# Altium PCB Altium PCB.pcbdoc
Units mil, origin at the board's own origin, x right, y up, seen from the top; angles counter-clockwise.
Board outline 4600 x 4620 mil, 2 copper layers (Top Layer, Bottom Layer); 37 components, 96 nets, 178 pads, 15 vias.
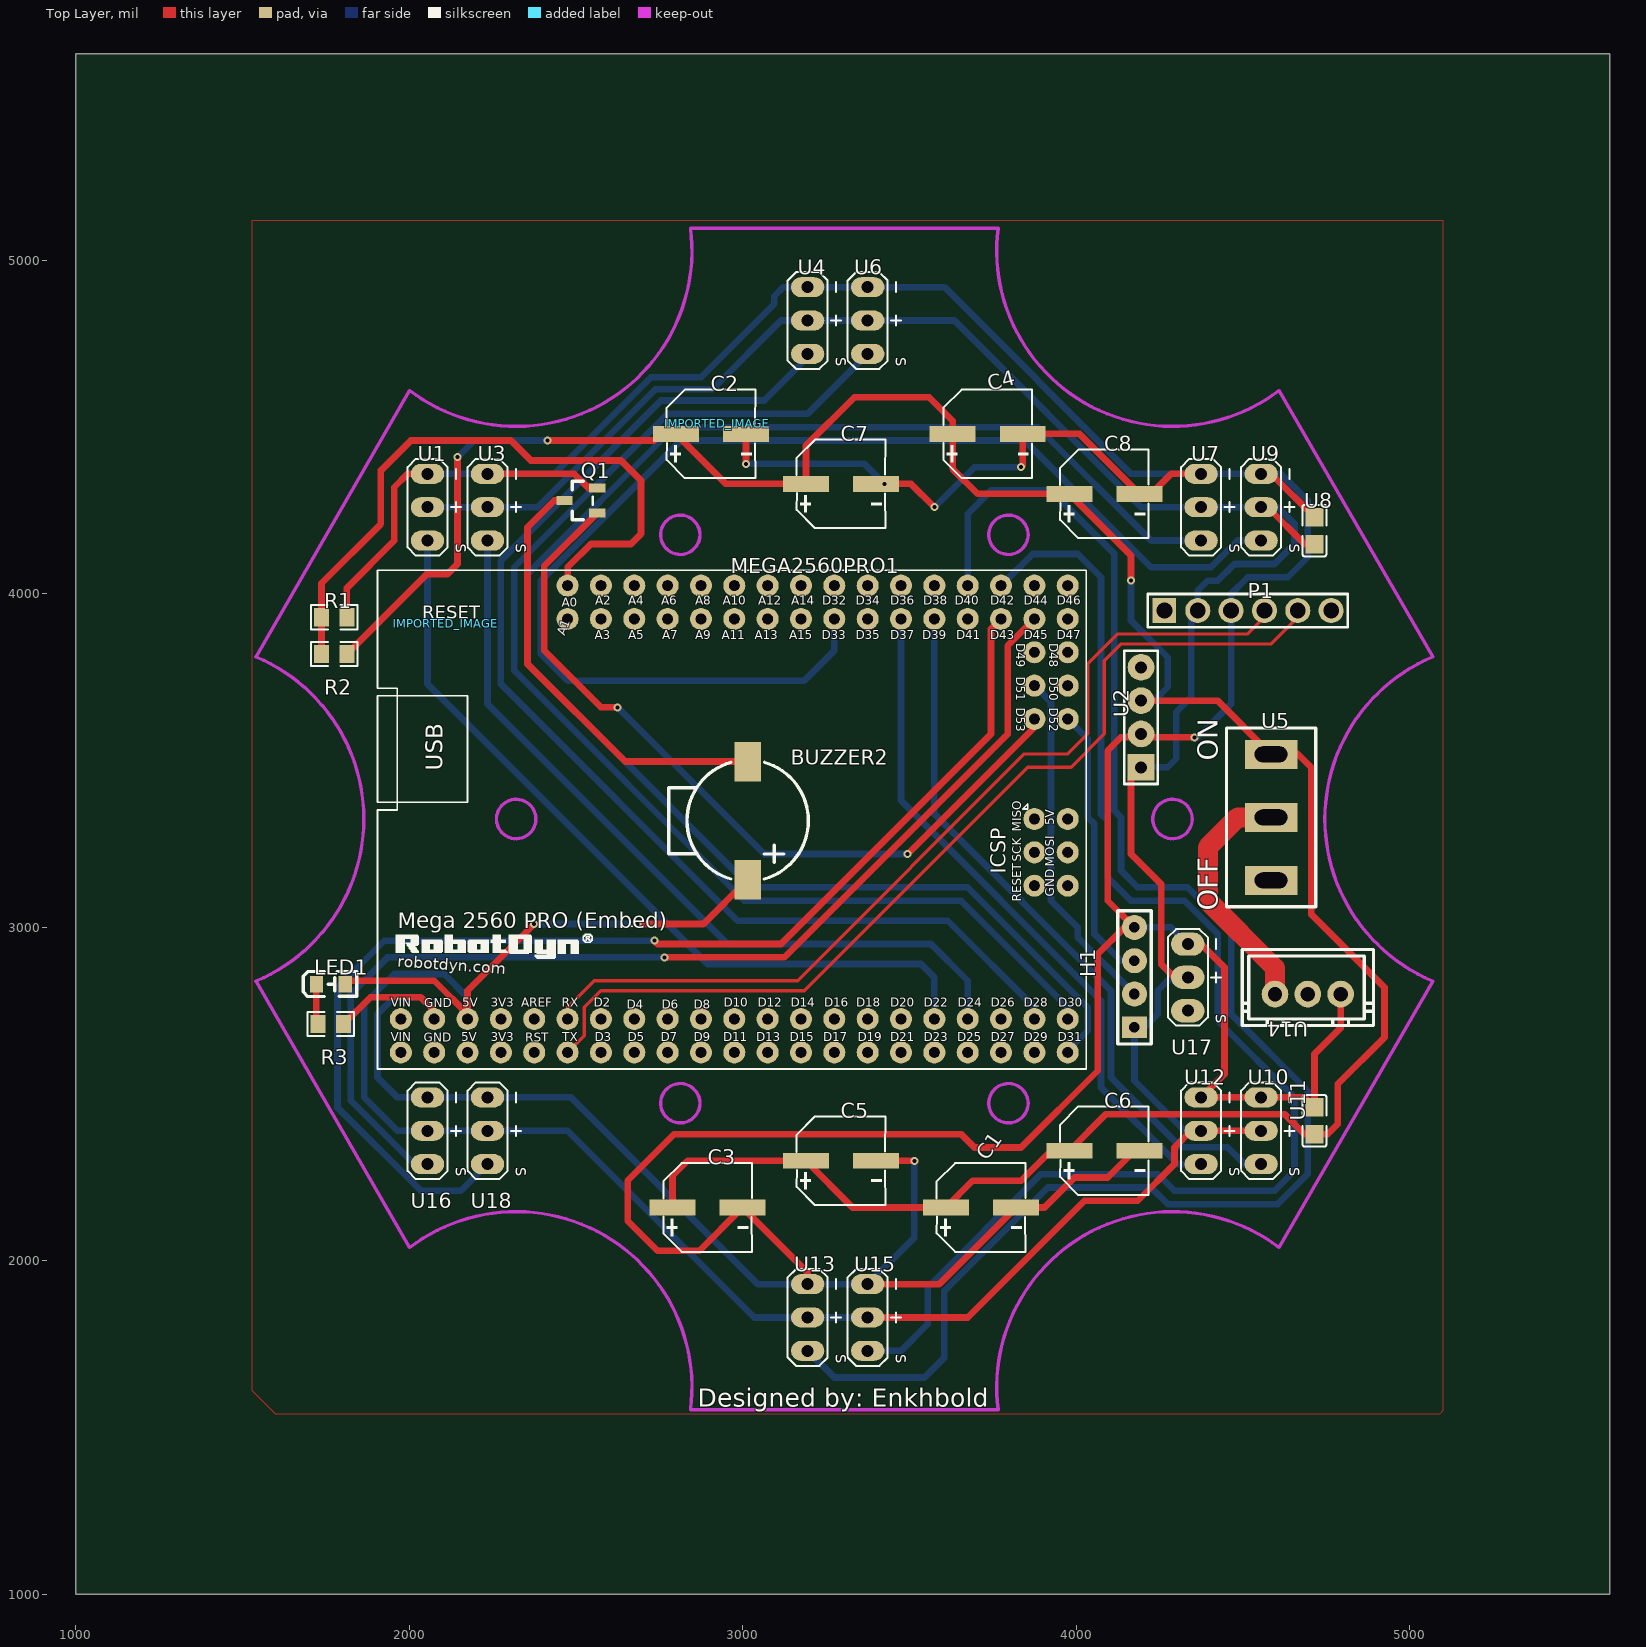
[diagram p0: Top Layer view]
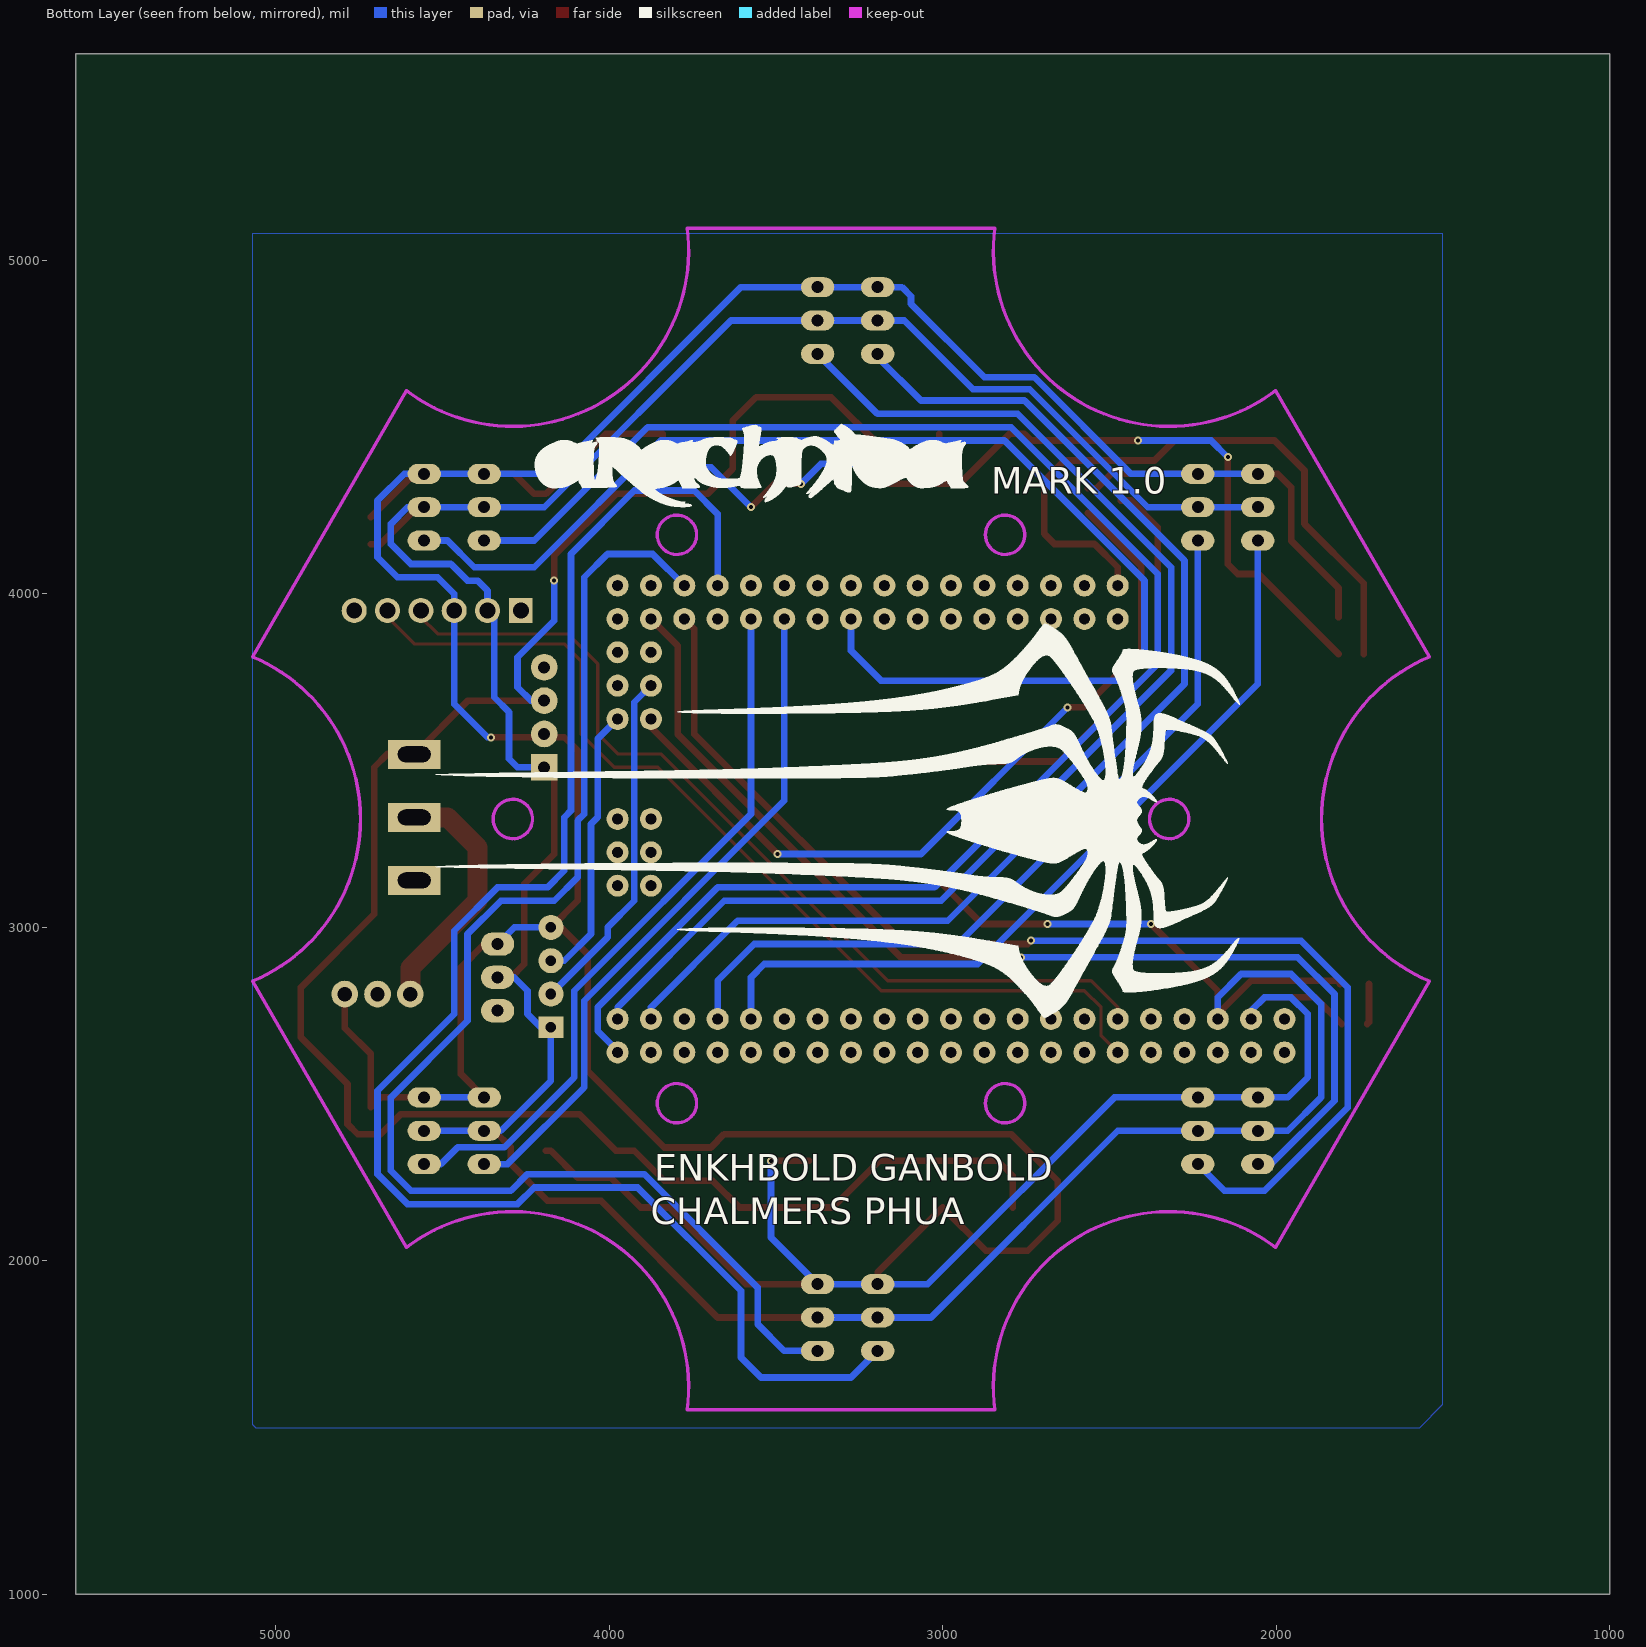
[diagram p1: Bottom Layer view, seen from below]

## Layer stack, top to bottom
Top Layer: signal copper (thickness not stored)
Dielectric: dielectric 12.6, FR-4, Dk 4.8
Bottom Layer: signal copper (thickness not stored)

## Board outline
5600,1000 1000,1000 1000,5620 5600,5620

## Components (designator, comment, footprint, x,y, rotation, side; value= is the part's Value field where it differs from the comment)
BUZZER2 "KLJ-9025-3627" BUZ-SMD_KLJ-90XX-3627 3015,3320 r270 top
C1 "220uF" CAP-SMD_BD6.3-L6.6-W6.6-FD 3715,2160 r0 top
C2 "220uF" CAP-SMD_BD6.3-L6.6-W6.6-FD 2905,4480 r0 top
C3 "220uF" CAP-SMD_BD6.3-L6.6-W6.6-FD 2895,2160 r0 top
C4 "220uF" CAP-SMD_BD6.3-L6.6-W6.6-FD 3735,4480 r0 top
C5 "220uF" CAP-SMD_BD6.3-L6.6-W6.6-FD 3295,2300 r0 top
C6 "220uF" CAP-SMD_BD6.3-L6.6-W6.6-FD 4085,2330 r0 top
C7 "220uF" CAP-SMD_BD6.3-L6.6-W6.6-FD 3295,4330 r0 top
C8 "220uF" CAP-SMD_BD6.3-L6.6-W6.6-FD 4085,4300 r0 top
H1 "Header-Male-2.54_1x4" 2.54-1*4P_JX 4175,2850 r90 top
IMPORTED_IMAGE "IMPORTED_IMAGE" IMPORTED_IMAGE 2109.57,3910.55 r0 top
IMPORTED_IMAGE "IMPORTED_IMAGE" IMPORTED_IMAGE 2923.52,4510.61 r0 top
LED1 "LED0805" LED0805-RD 1765,2830 r0 top
MEGA2560PRO1 "MEGA2560PRO-EMBED" MEGA2560PRO-EMBED 3275,3375 r0 top
P1 "Bluetooth JDY-30" HDR-6X1/2.54 4515,3950 r0 top
Q1 "2N3904TFR" SOT-23-3_L2.9-W1.3-P1.90-LS2.4-TR 2515,4280 r0 top
R1 "4.7KΩ" R0805 1775,3930 r180 top
R2 "3.3KΩ" R0805 1775,3820 r0 top
R3 "3.3KΩ" R0805 1765,2710 r180 top
U1 "sensor-header-3pin" SERVO-HEADER-3PIN#1 2055,4260 r0 top
U2 "DROK 5V REG" HDR1X4 4195,3630 r90 top
U3 "sensor-header-3pin" SERVO-HEADER-3PIN#1 2235,4260 r0 top
U4 "sensor-header-3pin" SERVO-HEADER-3PIN#1 3195,4820 r0 top
U5 "CYT1107" CYT1107 4585,3330 r270 top
U6 "sensor-header-3pin" SERVO-HEADER-3PIN#1 3375,4820 r0 top
U7 "sensor-header-3pin" SERVO-HEADER-3PIN#1 4375,4260 r0 top
U8 "0.47uF-C0805" C0805 4715,4190 r90 top
U9 "sensor-header-3pin" SERVO-HEADER-3PIN#1 4555,4260 r0 top
U10 "sensor-header-3pin" SERVO-HEADER-3PIN#1 4555,2390 r0 top
U11 "0.47uF-C0805" C0805 4715,2420 r90 top
U12 "sensor-header-3pin" SERVO-HEADER-3PIN#1 4375,2390 r0 top
U13 "sensor-header-3pin" SERVO-HEADER-3PIN#1 3195,1830 r0 top
U14 "HEAD3" CONN-TH_XH2.54-3P 4695,2800 r180 top
U15 "sensor-header-3pin" SERVO-HEADER-3PIN#1 3375,1830 r0 top
U16 "sensor-header-3pin" SERVO-HEADER-3PIN#1 2055,2390 r0 top
U17 "sensor-header-3pin" SERVO-HEADER-3PIN#2 4335,2850 r0 top
U18 "sensor-header-3pin" SERVO-HEADER-3PIN#1 2235,2390 r0 top

## Footprints (in the part's own frame and the unit in brackets; to place one, negate y for a bottom-side part, rotate by r counter-clockwise, add the part's x,y. Pads: shape width x height; smd on the part's side, far side on the other; paste and mask are expansions set on the pad)
2.54-1*4P_JX [mm]
  rect 1.651x1.905 hole 0.81: 1(-3.81,0)
  round 1.905 hole 0.81: 2(-1.27,0) 3(1.27,0) 4(3.81,0)
  silkscreen extent -5.08,-1.27 5.08,1.27
BUZ-SMD_KLJ-90XX-3627 [mm]
  rect 3x2 smd: 1(4.5,0) 2(-4.5,0)
  silkscreen extent -4.44,-6 4.45,4.62
C0805 [mm]
  rect 1.41x1.35 smd: 1(-1.03,0) 2(1.03,0)
  silkscreen extent -1.96,-0.9 1.96,0.9
CAP-SMD_BD6.3-L6.6-W6.6-FD [mm]
  rect 3.5x1.2 smd: 1(-2.67,0) 2(2.67,0)
  silkscreen extent -3.38,-3.38 3.38,3.38
CONN-TH_XH2.54-3P [mil]
  round 80 hole 43.31: 1(-98.43,0) 2(0,0) 3(98.42,0)
  silkscreen extent -197,-134 197,94
CYT1107 [mm]
  rect 2.2x4 hole 1.2 slot 2.5 at 90 deg: 1(-4.8,0) 2(0,0) 3(4.8,0)
  silkscreen extent -6.8,-3.4 6.8,3.4
HDR1X4 [mil]
  rect 80x80 hole 36: 1(-150,0)
  round 80 hole 36: 2(-50,0) 3(50,0) 4(150,0)
  silkscreen extent -200,-50 200,50
HDR-6X1/2.54 [mm]
  rect 1.8x1.905 hole 1.2: 1(-6.35,0)
  round 1.905 hole 1.2: 2(-3.81,0) 3(-1.27,0) 4(1.27,0) 5(3.81,0) 6(6.35,0)
  silkscreen extent -7.62,-1.27 7.62,1.27
IMPORTED_IMAGE [mil]
LED0805-RD [mm]
  rect 1x1.25 smd: 1(-1.1,0) 2(1.1,0)
  silkscreen extent -2.1,-0.95 1.98,0.96
MEGA2560PRO-EMBED [mil]
  round 66 hole 31.5 slot 31.7 at 0 deg: 3V3@1(-1000,-750) 3V3@2(-1000,-650) 5V@1(-1100,-750) 5V@2(-1100,-650) 5V@3(700,-50) A0(-800,650) A1(-800,550) A2(-700,650) A3(-700,550) A4(-600,650) A5(-600,550) A6(-500,650) A7(-500,550) A8(-400,650) A9(-400,550) A10(-300,650) A11(-300,550) A12(-200,650) A13(-200,550) A14(-100,650) A15(-100,550) AREF(-900,-650) D2(-700,-650) D3(-700,-750) D4(-600,-650) D5(-600,-750) D6(-500,-650) D7(-500,-750) D8(-400,-650) D9(-400,-750) D10(-300,-650) D11(-300,-750) D12(-200,-650) D13(-200,-750) D14(-100,-650) D15(-100,-750) D16(0,-650) D17(0,-750) D18(100,-650) D19(100,-750) D20(200,-650) D21(200,-750) D22(300,-650) D23(300,-750) D24(400,-650) D25(400,-750) D26(500,-650) D27(500,-750) D28(600,-650) D29(600,-750) D30(700,-650) D31(700,-750) D32(0,650) D33(0,550) D34(100,650) D35(100,550) D36(200,650) D37(200,550) D38(300,650) D39(300,550) D40(400,650) D41(400,550) D42(500,650) D43(500,550) D44(600,650) D45(600,550) D46(700,650) D47(700,550) D48(700,450) D49(600,450) D50(700,350) D51(600,350) D52(700,250) D53(600,250) GND@1(-1200,-750) GND@2(-1200,-650) GND@3(700,-250) MISO(600,-50) MOSI(700,-150) RESET(600,-250) RST(-900,-750) RX(-800,-650) SCK(600,-150) TX(-800,-750) VIN@1(-1300,-750) VIN@2(-1300,-650)
  silkscreen extent -1370,-800 756,696
R0805 [mil]
  rect 44.59x54.21 smd: 1(-38.04,0) 2(38.04,0)
  silkscreen extent -69,-36 69,36
SERVO-HEADER-3PIN#1 [mil]
  oval 100x60 hole 36: 1(0,100) 2(0,0) 3(0,-100)
  silkscreen extent -60,-145 100,145
SERVO-HEADER-3PIN#2 [mil]
  oval 100x70 hole 36: 1(0,100) 2(0,0) 3(0,-100)
  silkscreen extent -60,-145 100,145
SOT-23-3_L2.9-W1.3-P1.90-LS2.4-TR [mm]
  rect 1.25x0.7 smd: 1(1.25,0.95) 2(1.25,-0.95) 3(-1.25,0)
  silkscreen extent -0.65,-1.46 0.9,1.46

## Via types
v1: diameter 24, hole 12, Top Layer to Bottom Layer, tented both sides, 15 vias

## Nets (pads, with @x,y where several pads share a name; then routed paths per layer and width w, separated by ;. In a path a pad name is that pad's centre, name@x,y a point inside that pad or via, vN(x,y) a via of type N, cw(c..) or ccw(c..) an arc to the next point about the centre after c; other vN are vias at no path point)
BVIN: U5.2 U14.3 | length 750.8
  Top Layer w60: U5.2 4485,3330 4395,3240 4395,3080 4596.6,2878.4 U14.3
D22: MEGA2560PRO1.D22 U1.3 | length 2439.5
  Bottom Layer w20: U1.3 2055,3730 2895,2890 3535,2890 3575,2850 MEGA2560PRO1.D22
D24: MEGA2560PRO1.D24 U3.3 | length 2388.8
  Bottom Layer w20: U3.3 2235,3670 2955,2950 3565,2950 3675,2840 MEGA2560PRO1.D24
D28: MEGA2560PRO1.D28 U4.3 | length 3589.5
  Bottom Layer w20: U4.3 3195,4710 3065,4580 2755,4580 2275,4100 2275,3730 2985,3020 3615,3020 3875,2760 MEGA2560PRO1.D28
D30: MEGA2560PRO1.D30 U6.3 | length 3748.5
  Bottom Layer w20: U6.3 3195,4540 2775,4540 2315,4080 2315,3770 3005,3080 3655,3080 3975,2760 MEGA2560PRO1.D30
D31: MEGA2560PRO1.D31 U7.3 | length 4879.6
  Bottom Layer w20: MEGA2560PRO1.D31 3975,2630 4035,2690 4035,2760 3675,3120 3025,3120 2355,3790 2355,4060 2795,4500 3885,4500 4225,4160 U7.3
D33: MEGA2560PRO1.D33 U9.3 | length 3789.9
  Bottom Layer w20: MEGA2560PRO1.D33 3275,3830 3185,3740 2475,3740 2395,3820 2395,4040 2815,4460 3845,4460 4225,4080 4405,4080 4485,4160 U9.3
D37: MEGA2560PRO1.D37 U12.3 | length 2048.8
  Bottom Layer w20: MEGA2560PRO1.D37 3475,3380 4075,2780 4075,2520 4305,2290 U12.3
D39: MEGA2560PRO1.D39 U10.3 | length 2152.2
  Bottom Layer w20: MEGA2560PRO1.D39 3575,3340 4105,2810 4105,2550 4314.9,2340.1 4454.9,2340.1 4505,2290 U10.3
D40: MEGA2560PRO1.D40 U13.3 | length 4895.2
  Bottom Layer w20: U13.3 3275,1650 3545,1650 3605,1710 3605,1910 3915,2220 4225,2220 4275,2170 4605,2170 4695,2260 4695,2510 4465,2740 4465,2990 4335,3120 4185,3120 4135,3170 4135,3330 4115,3350 4115,4120 3925,4310 3745,4310 3675,4240 MEGA2560PRO1.D40
D42: MEGA2560PRO1.D42 U15.3 | length 4091.8
  Bottom Layer w20: U15.3 3475,1730 3555,1810 3555,1920 3895,2260 4245,2260 4295,2210 4595,2210 4655,2270 4655,2490 4425,2720 4425,2980 4325,3080 4165,3080 4095,3150 4095,3320 4075,3340 4075,4050 4005,4120 3870,4120 MEGA2560PRO1.D42
D43: MEGA2560PRO1.D43 U18.3 | length 3587.2
  Top Layer w20: v1(2735,2960) 2745,2950 3115,2950 3745,3580 3745,3895 MEGA2560PRO1.D43
  Bottom Layer w20: U18.3 2155,2210 2035,2210 1785,2460 1785,2820 1925,2960 v1(2735,2960)
D45: MEGA2560PRO1.D45 U16.3 | length 3299.9
  Top Layer w20: v1(2765,2910) 3125,2910 3795,3580 3795,3845 MEGA2560PRO1.D45
  Bottom Layer w20: U16.3 2015,2290 1825,2480 1825,2800 1935,2910 v1(2765,2910)
D49-USONIC: U17.3
D53-BUZZ: MEGA2560PRO1.D53 Q1.2 | length 2383.6
  Top Layer w20: Q1.2 2405,4083.4 2405,3830 2575,3660 v1(2625,3660) ; v1(3495,3220) 3875,3600 MEGA2560PRO1.D53
  Bottom Layer w20: v1(2625,3660) 3065,3220 v1(3495,3220)
ECHO: H1.3 MEGA2560PRO1.D52 | length 831.3
  Bottom Layer w20: MEGA2560PRO1.D52 4035,3565 4035,3330 4055,3310 4055,2980 4135,2900 H1.3
GND: C1.2 C2.2 C3.2 C4.2 C5.2 C6.2 C7.2 C8.2 H1.4 MEGA2560PRO1.GND@2 P1.3 Q1.1 R1.1 R3.1 U1.1 U2.2 U3.1 U4.1 U6.1 U7.1 U8.2 U9.1 U10.1 U11.2 U12.1 U13.1 U14.1 U15.1 U16.1 U17.1 U18.1 | length 16408.2
  Top Layer w20: R3.1 1883,2790 2035,2790 2075,2750 2075,2725 ; R1.1 1813,4018 1955,4160 1955,4320 1995,4360 U1.1 ; U3.1 2495,4360 2537.6,4317.4 Q1.1 ; v1(3010.12,4390) C2.2 ; U13.1 3195,1965.12 C3.2 2870.1,2030 2745,2030 2655,2120 2655,2240 2795,2380 3655.4,2380 3695.4,2340 3835,2340 4065,2570 4065,2920 4145,3000 H1.4 4095,3080 4095,3530 4135,3570 4185,3570 U2.2 4205,3570 v1(4355,3570) ; U15.1 3590.12,1930 C1.2 3905.45,2160 3995.45,2250 4095,2250 4175,2330 C6.2 ; C5.2 v1(3515,2300) ; v1(3425,4330) 3505,4330 v1(3575,4260) ; v1(3835,4380) 3840.12,4385.12 C4.2 4010.12,4480 C8.2 4225,4300 4285,4360 U7.1 ; U17.1 4375,2950 4445,2880 4445,2560 U12.1 U10.1 4685.55,2490 U11.2 4715,2620 4793.42,2698.42 U14.1 ; U9.1 4585.55,4360 U8.2
  Bottom Layer w20: U1.1 U3.1 2435,4360 2725,4650 2875,4650 3095,4870 3095,4892.6 3122.4,4920 U4.1 U6.1 3605,4920 4165,4360 U7.1 U9.1 4615,4360 4695,4280 4695,4110 4635,4050 4515,4050 4465,4000 P1.3 4465,3670 4365,3570 v1(4355,3570) ; 2075,2725 2075,2750 2035,2790 1955,2790 1905,2740 1905,2550 1965,2490 U16.1 U18.1 2485,2490 3045,1930 U13.1 U15.1 3515,2070 v1(3515,2300) ; v1(3010.12,4390) 3365,4390 v1(3425,4330) ; v1(3575,4260) 3695,4380 v1(3835,4380) ; H1.4 4285,3000 U17.1 ; U12.1 U10.1
MEGA2560PRO1_3V3@1: MEGA2560PRO1.3V3@1
MEGA2560PRO1_3V3@2: MEGA2560PRO1.3V3@2
MEGA2560PRO1_5V@1: MEGA2560PRO1.5V@1
MEGA2560PRO1_5V@3: MEGA2560PRO1.5V@3
MEGA2560PRO1_A1: MEGA2560PRO1.A1
MEGA2560PRO1_A2: MEGA2560PRO1.A2
MEGA2560PRO1_A3: MEGA2560PRO1.A3
MEGA2560PRO1_A4: MEGA2560PRO1.A4
MEGA2560PRO1_A5: MEGA2560PRO1.A5
MEGA2560PRO1_A6: MEGA2560PRO1.A6
MEGA2560PRO1_A7: MEGA2560PRO1.A7
MEGA2560PRO1_A8: MEGA2560PRO1.A8
MEGA2560PRO1_A9: MEGA2560PRO1.A9
MEGA2560PRO1_A10: MEGA2560PRO1.A10
MEGA2560PRO1_A11: MEGA2560PRO1.A11
MEGA2560PRO1_A12: MEGA2560PRO1.A12
MEGA2560PRO1_A13: MEGA2560PRO1.A13
MEGA2560PRO1_A14: MEGA2560PRO1.A14
MEGA2560PRO1_A15: MEGA2560PRO1.A15
MEGA2560PRO1_AREF: MEGA2560PRO1.AREF
MEGA2560PRO1_D2: MEGA2560PRO1.D2
MEGA2560PRO1_D3: MEGA2560PRO1.D3
MEGA2560PRO1_D4: MEGA2560PRO1.D4
MEGA2560PRO1_D5: MEGA2560PRO1.D5
MEGA2560PRO1_D6: MEGA2560PRO1.D6
MEGA2560PRO1_D7: MEGA2560PRO1.D7
MEGA2560PRO1_D8: MEGA2560PRO1.D8
MEGA2560PRO1_D9: MEGA2560PRO1.D9
MEGA2560PRO1_D10: MEGA2560PRO1.D10
MEGA2560PRO1_D11: MEGA2560PRO1.D11
MEGA2560PRO1_D12: MEGA2560PRO1.D12
MEGA2560PRO1_D13: MEGA2560PRO1.D13
MEGA2560PRO1_D14: MEGA2560PRO1.D14
MEGA2560PRO1_D15: MEGA2560PRO1.D15
MEGA2560PRO1_D16: MEGA2560PRO1.D16
MEGA2560PRO1_D17: MEGA2560PRO1.D17
MEGA2560PRO1_D18: MEGA2560PRO1.D18
MEGA2560PRO1_D19: MEGA2560PRO1.D19
MEGA2560PRO1_D20: MEGA2560PRO1.D20
MEGA2560PRO1_D21: MEGA2560PRO1.D21
MEGA2560PRO1_D23: MEGA2560PRO1.D23
MEGA2560PRO1_D25: MEGA2560PRO1.D25
MEGA2560PRO1_D26: MEGA2560PRO1.D26
MEGA2560PRO1_D27: MEGA2560PRO1.D27
MEGA2560PRO1_D29: MEGA2560PRO1.D29
MEGA2560PRO1_D32: MEGA2560PRO1.D32
MEGA2560PRO1_D34: MEGA2560PRO1.D34
MEGA2560PRO1_D35: MEGA2560PRO1.D35
MEGA2560PRO1_D36: MEGA2560PRO1.D36
MEGA2560PRO1_D38: MEGA2560PRO1.D38
MEGA2560PRO1_D41: MEGA2560PRO1.D41
MEGA2560PRO1_D44: MEGA2560PRO1.D44
MEGA2560PRO1_D46: MEGA2560PRO1.D46
MEGA2560PRO1_D47: MEGA2560PRO1.D47
MEGA2560PRO1_D48: MEGA2560PRO1.D48
MEGA2560PRO1_D49: MEGA2560PRO1.D49
MEGA2560PRO1_D50: MEGA2560PRO1.D50
MEGA2560PRO1_GND@1: MEGA2560PRO1.GND@1
MEGA2560PRO1_GND@3: MEGA2560PRO1.GND@3
MEGA2560PRO1_MISO: MEGA2560PRO1.MISO
MEGA2560PRO1_MOSI: MEGA2560PRO1.MOSI
MEGA2560PRO1_RESET: MEGA2560PRO1.RESET
MEGA2560PRO1_RST: MEGA2560PRO1.RST
MEGA2560PRO1_SCK: MEGA2560PRO1.SCK
MEGA2560PRO1_VIN@1: MEGA2560PRO1.VIN@1
MEGA2560PRO1_VIN@2: MEGA2560PRO1.VIN@2
P1_1: P1.1
P1_6: P1.6
Q1_3: BUZZER2.2 Q1.3 | length 1335.2
  Top Layer w20: Q1.3 2435,4280 2355,4200 2355,3790 2647.8,3497.2 BUZZER2.2
R3_2: LED1.1 R3.2 | length 122.2
  Top Layer w20: LED1.1 1721.69,2715.27 R3.2
RXD: MEGA2560PRO1.TX P1.5 | length 2929.2
  Top Layer w10: MEGA2560PRO1.TX 2525,2675 2525,2760 2575,2810 3185,2810 3855,3480 3985,3480 4085,3580 4085,3800 4135,3850 4585,3850 4665,3930 P1.5
TRIG: H1.2 MEGA2560PRO1.D51 | length 1049.3
  Bottom Layer w20: MEGA2560PRO1.D51 3925,3675 3925,3080 4005,3000 4005,2970 H1.2
TXD: MEGA2560PRO1.RX P1.4 | length 2752.6
  Top Layer w10: MEGA2560PRO1.RX 2475,2760 2555,2840 3165,2840 3845,3520 3975,3520 4035,3580 4035,3790 4125,3880 4515,3880 4565,3930 P1.4
U2_4: U2.4
U5_3: U5.3
U14_2: U14.2
VCC: BUZZER2.1 H1.1 LED1.2 MEGA2560PRO1.5V@2 P1.2 U1.2 U2.1 U3.2 U4.2 U6.2 U7.2 U8.1 U9.2 U10.2 U12.2 U13.2 U15.2 U16.2 U17.2 U18.2 | length 11389.1
  Top Layer w20: LED1.2 1808.3,2840 2075,2840 2175,2740 2175,2725 2175,2810 v1(2375,3010) ; v1(2685,3010) 2882.16,3010 BUZZER2.1 ; U15.2 3675,1830 4025,2180 4185,2180 4295,2290 4295,2340 4345,2390 U12.2 U10.2 ; U2.1 4165,3450 4165,3220 4255,3130 4255,2890 4295,2850 U17.2 ; U9.2 4575,4260 4685.6,4149.5 U8.1@4715,4149.5
  Bottom Layer w20: U1.2 U3.2 2385,4260 2738.72,4613.71 2909.15,4613.71 3115.43,4820 U4.2 U6.2 3635,4820 4195,4260 U7.2 U9.2 4605,4260 4655,4210 4655,4150 4595,4090 4475,4090 4425,4040 4395,4040 4365,4010 P1.2 4345,3930 4345,3690 4300.5,3645.5 4300.5,3505.5 4275,3480 U2.1 ; 2175,2725 2175,2790 2105,2860 1955,2860 1865,2770 1865,2490 1965,2390 U16.2 U18.2 2475,2390 3035,1830 U13.2 U15.2 ; v1(2375,3010) v1(2685,3010) ; U17.2 4285,2850 4245,2810 4245,2740 4205,2700 H1.1 4175,2540 4325,2390 U12.2 U10.2
VIN: C1.1 C2.1 C3.1 C4.1 C5.1 C6.1 C7.1 C8.1 R2.2 U2.3 U5.1 U11.1 | length 8001.5
  Top Layer w20: R2.2 2053.04,4060 2115,4060 2145,4090 v1(2145,4410) ; v1(2415,4460) 2735,4460 2755,4480 C2.1 2949.88,4330 C7.1 3189.9,4444.9 3335,4590 3559.4,4590 3629.9,4519.5 C4.1 3629.9,4375.1 3705,4300 C8.1 4165,4114.88 v1(4165,4040) ; C3.1 2789.88,2254.88 2835,2300 C5.1 3329.88,2160 C1.1 3689.9,2240 3835,2240 3925,2330 C6.1 4089.9,2440 4625,2440 4685.6,2379.5 U11.1@4715,2379.5 ; U2.3 4423.98,3680 U5.1 4663.98,3518.98 4665,3520 4705,3480 4705,3040 4925,2820 4925,2670 4785,2530 4785,2410 4754.45,2379.45 U11.1
  Bottom Layer w20: v1(2145,4410) 2195,4460 v1(2415,4460) ; v1(4165,4040) 4165,3920 4275,3810 4275,3720 4235,3680 U2.3
VM-A0: MEGA2560PRO1.A0 R1.2 R2.1 | length 1967.1
  Top Layer w20: R2.1 R1.2 ; R1.2 1737,4032 1915,4210 1915,4370 2005,4460 2305,4460 2365,4400 2635,4400 2695,4340 2695,4180 2665,4150 2545,4150 2475,4080 MEGA2560PRO1.A0

## Polygon pours and split planes (outlines as drawn)
GND on Bottom Layer (solid): 1500,5080 5070,5080 5070,1510 5060,1500 1570,1500 1500,1570
GND on Top Layer (solid): 1530,5120 5100,5120 5100,1550 5090,1540 1600,1540 1530,1610

## Keep-outs
Keep-Out Layer:
  circle w10: c2320.75,3325 r59.06
  circle w10: c2812.87,2472.61 r59.06
  circle w10: c3797.13,2472.61 r59.06
  circle w10: c4289.25,3325 r59.06
  circle w10: c3797.13,4177.39 r59.06
  circle w10: c2812.87,4177.39 r59.06
  lines w10: 1540.08,2838.61 ccw(c1336.5,3325) 1540.08,3811.39 ; 2001.32,2039.73 cw(c2320.75,1620.23) 2843.77,1553.35 ; 2001.32,4610.27 ccw(c2320.75,5029.77) 2843.77,5096.65 ; 3766.23,1553.35 cw(c4289.25,1620.23) 4608.68,2039.73 ; 3766.23,5096.65 ccw(c4289.25,5029.77) 4608.68,4610.27 ; 5069.92,2838.61 cw(c5273.5,3325) 5069.92,3811.39

## Silkscreen, mask and mechanical layers (free items; w line width, h text height)
Top Overlay:
  text "ON" at 4425,3500 h60 r90
  text "OFF" at 4425,3050 h60 r90
  text "Designed by: Enkhbold" at 2865,1562.5 h55
Bottom Overlay:
  text "MARK 1.0" at 2855,4300 h80
  text "ENKHBOLD GANBOLD" at 3865,2240 h80
  text "CHALMERS PHUA" at 3875,2110 h80

## Text inside footprints (layer, text, board x,y; h text height)
MEGA2560PRO1: Top Overlay "D29" at 3842.93,2657.74 h26; Top Overlay "D17" at 3241.61,2657.74 h26; Top Overlay "3V3" at 2245.25,2657.74 h26; Top Overlay "D27" at 3743.55,2657.74 h26; Top Overlay "D25" at 3643.62,2657.74 h26; Top Overlay "D21" at 3442.25,2657.74 h26; Top Overlay "D19" at 3345.24,2657.74 h26; Top Overlay "D13" at 3041.4,2657.74 h26; Top Overlay "D11" at 2942.37,2657.74 h26; Top Overlay "D9" at 2853.87,2657.74 h26; Top Overlay "D5" at 2654.76,2657.87 h26; Top Overlay "RST" at 2347.36,2657.35 h26; Top Overlay "D3" at 2555.86,2657.74 h26; Top Overlay "TX" at 2458.35,2657.87 h26; Top Overlay "5V" at 2156.63,2657.87 h26; Top Overlay "GND" at 2044.34,2657.35 h26; Top Overlay "D31" at 3944.54,2657.74 h26; Top Overlay "D23" at 3543.58,2657.74 h26; Top Overlay "D15" at 3140.71,2657.74 h26; Top Overlay "D7" at 2754.57,2657.87 h26; Top Overlay "VIN" at 1944.93,2657.87 h26; Top Overlay "D14" at 3144.05,2761.29 h26; Top Overlay "D30" at 3946.6,2761.29 h26; Top Overlay "D24" at 3645.49,2761.29 h26; Top Overlay "D18" at 3341.04,2761.29 h26; Top Overlay "D28" at 3843.2,2761.29 h26; Top Overlay "D26" at 3744.29,2761.29 h26; Top Overlay "D22" at 3542.72,2761.29 h26; Top Overlay "D20" at 3442.91,2761.29 h26; Top Overlay "D16" at 3245.15,2761.29 h26; Top Overlay "D12" at 3044.63,2761.29 h26; Top Overlay "D10" at 2942.9,2761.29 h26; Top Overlay "D8" at 2853.14,2756.29 h26; Top Overlay "D2" at 2553.98,2761.29 h26; Top Overlay "RX" at 2456.9,2761.43 h26; Top Overlay "AREF" at 2335.52,2761.43 h26; Top Overlay "D6" at 2757.36,2756.29 h26; Top Overlay "D4" at 2651.9,2756.43 h26; Top Overlay "D52" at 3919.33,3658.93 h26 r270; Top Overlay "D53" at 3820.12,3658.93 h26 r270; Top Overlay "D50" at 3919.33,3751.47 h26 r270; Top Overlay "D48" at 3919.33,3852.73 h26 r270; Top Overlay "D51" at 3820.12,3751.26 h26 r270; Top Overlay "D49" at 3820.12,3852.73 h26 r270; Top Overlay "D46" at 3941.32,3967.07 h26; Top Overlay "D32" at 3239.14,3967.07 h26; Top Overlay "A10" at 2940.8,3967.07 h26; Top Overlay "D47" at 3942.81,3864.79 h26; Top Overlay "D33" at 3237.58,3864.65 h26; Top Overlay "A11" at 2937.95,3864.65 h26; Top Overlay "D42" at 3743.1,3967.07 h26; Top Overlay "D40" at 3635.99,3967.07 h26; Top Overlay "D38" at 3541.44,3967.07 h26; Top Overlay "D36" at 3442.91,3967.07 h26; Top Overlay "D34" at 3338.92,3967.07 h26; Top Overlay "A14" at 3145.22,3967.07 h26; Top Overlay "A12" at 3046.24,3967.07 h26; Top Overlay "D43" at 3742.25,3864.65 h26; Top Overlay "D41" at 3640.21,3864.65 h26; Top Overlay "D39" at 3538.88,3864.65 h26; Top Overlay "D37" at 3442.45,3864.65 h26; Top Overlay "D35" at 3338.99,3864.65 h26; Top Overlay "A15" at 3140.27,3864.65 h26; Top Overlay "A13" at 3036.49,3864.65 h26; Top Overlay "D44" at 3842.88,3967.21 h26; Top Overlay "D45" at 3843.01,3864.79 h26; Top Overlay "A9" at 2858.19,3864.65 h26; Top Overlay "A8" at 2858.08,3967.07 h26; Top Overlay "A6" at 2755.99,3967.07 h26; Top Overlay "A7" at 2758.84,3864.79 h26; Top Overlay "A5" at 2656.66,3864.79 h26; Top Overlay "A4" at 2656.78,3967.21 h26; Top Overlay "A3" at 2556.92,3864.65 h26; Top Overlay "A2" at 2557.6,3967.07 h26; Top Overlay "A1" at 2466.95,3872.99 h26 r69; Top Overlay "A0" at 2457.45,3962.07 h26; Top Overlay "robotdyn.com" at 1964.45,2881.49 h34.12 r356; Top Overlay "ICSP" at 3789.07,3161.44 h44.62 r90; Top Overlay "RESET" at 2038.67,3925.2 h39.37; Top Overlay "VIN" at 1944.96,2761.43 h26; Top Overlay "5V" at 2158.59,2761.43 h26; Top Overlay "GND" at 2045.12,2760.9 h26; Top Overlay "3V3" at 2244.17,2761.29 h26; Top Overlay "Mega 2560 PRO (Embed)" at 1965.54,2997.31 h47.24; Top Overlay "MISO" at 3834.88,3286.07 h26 r90; Top Overlay "SCK" at 3834.88,3196.07 h26 r90; Top Overlay "RESET" at 3834.88,3076.07 h26 r90; Top Overlay "GND" at 3934.88,3091.07 h26 r90; Top Overlay "MOSI" at 3934.88,3181.07 h26 r90; Top Overlay "5V" at 3934.88,3306.07 h26 r90; Top Overlay "USB" at 2100,3470 h50 r90
U1: Top Overlay "S" at 2139,4150 h32 r270
U3: Top Overlay "S" at 2319,4150 h32 r270
U4: Top Overlay "S" at 3279,4710 h32 r270
U6: Top Overlay "S" at 3459,4710 h32 r270
U7: Top Overlay "S" at 4459,4150 h32 r270
U9: Top Overlay "S" at 4639,4150 h32 r270
U10: Top Overlay "S" at 4639,2280 h32 r270
U12: Top Overlay "S" at 4459,2280 h32 r270
U13: Top Overlay "S" at 3279,1720 h32 r270
U15: Top Overlay "S" at 3459,1720 h32 r270
U16: Top Overlay "S" at 2139,2280 h32 r270
U17: Top Overlay "S" at 4419,2740 h32 r270
U18: Top Overlay "S" at 2319,2280 h32 r270